# EAGLE board MainBoard (EAGLE 9.6.2)
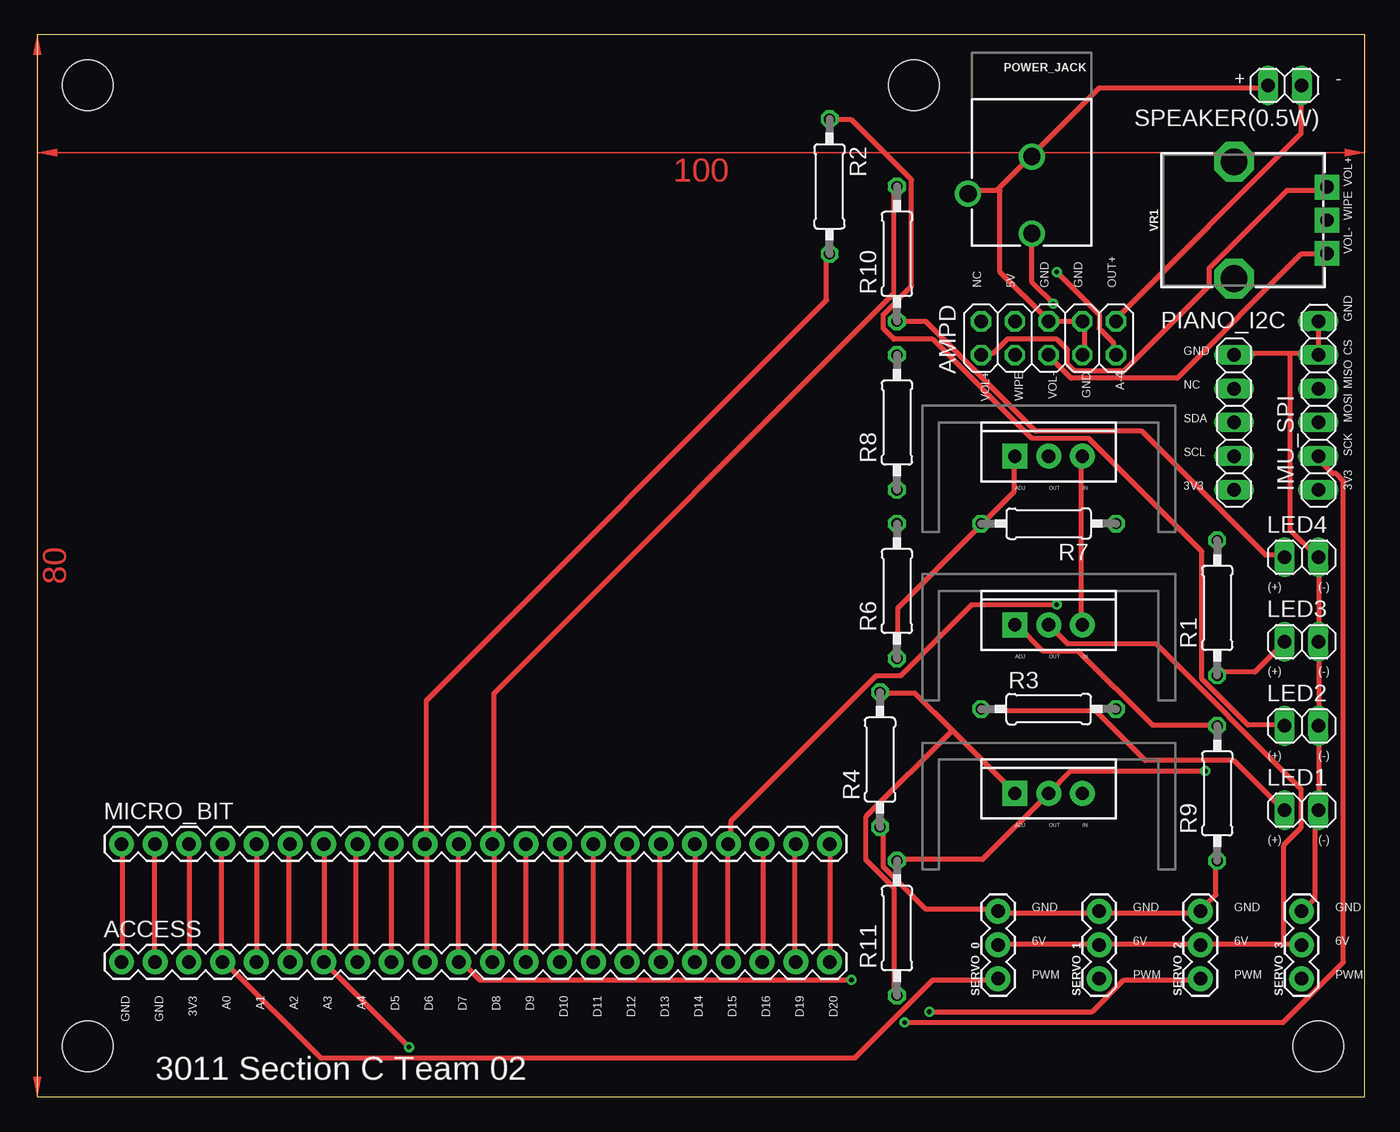
[diagram p0: board, top side]
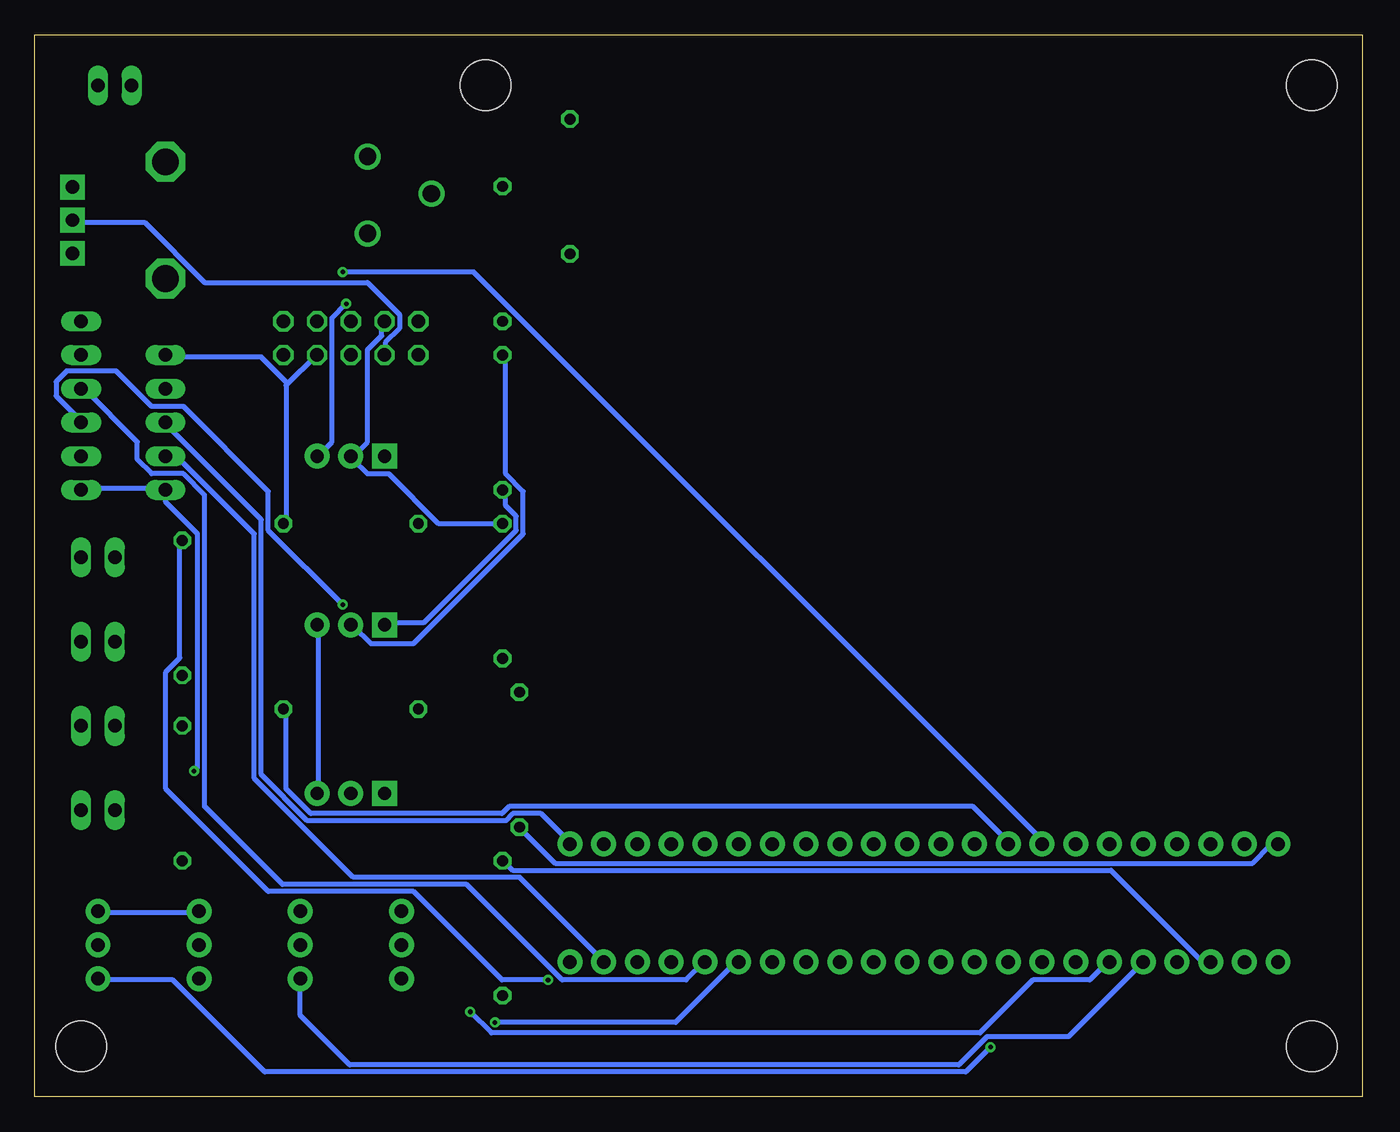
[diagram p1: board, bottom side, seen from below]

Size 100 x 80 mm. Coordinates in mm from the lower left corner, seen from the top.
Outline: 0,0 100,0 100,80 0,80 0,0
Copper layers (1*16): Top 0.035mm / dielectric 1.5mm / Bottom 0.035mm
Design rules "default *": minimum track width 15mil, minimum drill 0.35mm, track to track 6mil, track to pad 6mil, pad to pad 6mil, via to via 6mil, smd to smd 6mil, copper to edge 40mil, drill to drill 6mil, minimum pad ring 10mil, minimum via ring 8mil, stop-mask expansion 4mil, vias tented up to drill 0mil, thermal gap 10mil
Holes 3.81 mm at 3.81,3.81 96.52,3.81 3.81,76.2 66.04,76.2

## Footprints (pad centres in the part's own frame; a part is rotated, then mirrored left to right if it is on the bottom)
1X22 = drill 1.016 pad 1.88: 1 0,0; 2 2.54,0; 3 5.08,0; 4 7.62,0; 5 10.16,0; 6 12.7,0; 7 15.24,0; 8 17.78,0; 9 20.32,0; 10 22.86,0; 11 25.4,0; 12 27.94,0; 13 30.48,0; 14 33.02,0; 15 35.56,0; 16 38.1,0; 17 40.64,0; 18 43.18,0; 19 45.72,0; 20 48.26,0; 21 50.8,0; 22 53.34,0
2X05 = drill 1.016 octagon: 1 -5.08,-1.27; 2 -5.08,1.27; 3 -2.54,-1.27; 4 -2.54,1.27; 5 0,-1.27; 6 0,1.27; 7 2.54,-1.27; 8 2.54,1.27; 9 5.08,-1.27; 10 5.08,1.27
1X06 = drill 1.016 long: 1 -6.35,0; 2 -3.81,0; 3 -1.27,0; 4 1.27,0; 5 3.81,0; 6 6.35,0
1X02 = drill 1.016 long: 1 -1.27,0; 2 1.27,0
1X05 = drill 1.016 long: 1 -5.08,0; 2 -2.54,0; 3 0,0; 4 2.54,0; 5 5.08,0
POWER_JACK_PTH_BREAD = drill 1.3: GND 0,7.9; GNDBREAK 4.8,10.7; PWR 0,13.7
0207/10 = drill 0.813 octagon: 1 -5.08,0; 2 5.08,0
1X03 = drill 1.016 pad 1.88: 1 0,0; 2 2.54,0; 3 5.08,0
POT-PTH-ALPS = drill 1 pad 1.88 square: P$1 7,-2.5; P$2 7,0; P$3 7,2.5 | drill 2 octagon: P$4 0,-4.4; P$5 0,4.4
TO220-ADJ = drill 1 pad 1.88 square: ADJ -2.54,0 | drill 1 pad 1.88: IN 2.54,0; OUT 0,0

## Placement (x,y rotation side)
ACCESS  CONN_22_PTH  [1X22]  6.35,10.16 0 top
AMPD  [2X05]  76.2,57.15 180 top
IMU_SPI  [1X06]  96.52,52.07 90 top
LED1  [1X02]  95.25,21.59 0 top
LED2  [1X02]  95.25,27.94 0 top
LED3  [1X02]  95.25,34.29 0 top
LED4  [1X02]  95.25,40.64 0 top
MICRO_BIT  CONN_22_PTH  [1X22]  6.35,19.05 0 top
PIANO_I2C  [1X05]  90.17,50.8 90 top
POWER_JACK  POWER_JACKPTH_BREAD  [POWER_JACK_PTH_BREAD]  74.93,78.74 180 top
R1  750  [0207/10]  88.9,36.83 90 top
R2  750  [0207/10]  59.69,68.58 270 top
R3  750  [0207/10]  76.2,29.21 0 top
R4  1.8k  [0207/10]  63.5,25.4 90 top
R6  240  [0207/10]  64.77,38.1 90 top
R7  750  [0207/10]  76.2,43.18 180 top
R8  715  [0207/10]  64.77,50.8 90 top
R9  2.7k  [0207/10]  88.9,22.86 90 top
R10  750  [0207/10]  64.77,63.5 90 top
R11  470  [0207/10]  64.77,12.7 90 top
SERVO_0  SERVO  [1X03]  72.39,8.89 90 top
SERVO_1  SERVO  [1X03]  80.01,8.89 90 top
SERVO_2  SERVO  [1X03]  87.63,8.89 90 top
SERVO_3  SERVO  [1X03]  95.25,8.89 90 top
SPEAKER(0.5W)  [1X02]  93.98,76.2 180 top
VR1  10k  [POT-PTH-ALPS]  90.17,66.04 0 top
VREG1  V_REG_317SINK  [TO220-ADJ]  76.2,22.86 0 top
VREG2  V_REG_317SINK  [TO220-ADJ]  76.2,48.26 0 top
VREG3  V_REG_317SINK  [TO220-ADJ]  76.2,35.56 0 top

## Library data of the parts
ACCESS MICRO_BIT = SparkFun-Connectors; PROD_ID: CONN-13453
AMPD IMU_SPI LED1-LED4 PIANO_I2C SPEAKER(0.5W) = pinhead
POWER_JACK = SparkFun-Connectors; PROD_ID: COMP-13253
R1-R4 R6-R11 = rcl; SPICEPREFIX: R
SERVO_0 SERVO_1-SERVO_3 = SparkFun-Electromechanical
VR1 = SparkFun-Resistors; PROD_ID: RES-09177; SF_SKU: COM-09288
VREG1-VREG3 = SparkFun-IC-Power

## Nets
3V3: ACCESS.3 IMU_SPI.1 MICRO_BIT.3 PIANO_I2C.1 R11.2 VREG1.OUT
5V: AMPD.7 R6.2 VREG2.OUT
6V: R8.2 SERVO_0.2 SERVO_1.2 SERVO_2.2 SERVO_3.2 VREG3.OUT
A-0: ACCESS.4 MICRO_BIT.4 SERVO_0.1
A-1: ACCESS.5 MICRO_BIT.5 SERVO_1.1
A-2: ACCESS.6 MICRO_BIT.6 SERVO_2.1
A-3: ACCESS.7 MICRO_BIT.7 SERVO_3.1
A-4: ACCESS.8 AMPD.2 MICRO_BIT.8
D-5: ACCESS.9 MICRO_BIT.9 R3.2
D-6: ACCESS.10 MICRO_BIT.10 R2.2
D-7: ACCESS.11 MICRO_BIT.11 R1.2
D-8: ACCESS.12 MICRO_BIT.12 R10.2
D-9: ACCESS.13 MICRO_BIT.13
D-10: ACCESS.14 MICRO_BIT.14
D-11: ACCESS.15 MICRO_BIT.15
D-12: ACCESS.16 MICRO_BIT.16
D-13: ACCESS.17 IMU_SPI.2 MICRO_BIT.17
D-14: ACCESS.18 IMU_SPI.4 MICRO_BIT.18
D-15: ACCESS.19 IMU_SPI.3 MICRO_BIT.19
D-16: ACCESS.20 MICRO_BIT.20
D-19: ACCESS.21 MICRO_BIT.21 PIANO_I2C.2
D-20: ACCESS.22 MICRO_BIT.22 PIANO_I2C.3
GND1: ACCESS.1 AMPD.3 AMPD.4 AMPD.5 IMU_SPI.5 IMU_SPI.6 LED1.2 LED2.2 LED3.2 LED4.2 MICRO_BIT.1 PIANO_I2C.5 POWER_JACK.GND POWER_JACK.GNDBREAK R4.1 R7.1 R9.1 SERVO_0.3 SERVO_1.3 SERVO_2.3 SERVO_3.3 SPEAKER(0.5W).2
GND2: ACCESS.2 MICRO_BIT.2
MAIN6V: POWER_JACK.PWR VREG1.IN VREG2.IN VREG3.IN
N$1: LED1.1 R3.1
N$2: LED2.1 R2.1
N$3: LED3.1 R1.1
N$4: LED4.1 R10.1
N$6: R4.2 R11.1 VREG1.ADJ
N$8: R6.1 R7.2 VREG2.ADJ
N$10: R8.1 R9.2 VREG3.ADJ
OUT+: AMPD.1 SPEAKER(0.5W).1
VOL+: AMPD.10 VR1.P$3
VOL-: AMPD.6 VR1.P$1
WIPE: AMPD.8 VR1.P$2

## Tracks (layer width: path | path; a pad name or v marks a point on that pad's centre or on a via)
3V3  (via drill 0.35)
  Top 0.381: ACCESS.3 11.47,10.4 11.47,18.94 MICRO_BIT.3 | R11.2 64.81,17.87 71.21,17.87 VREG1.OUT 77.88,24.54 v88.01,24.54
  Bottom 0.381: IMU_SPI.1 96.28,45.87 90.41,45.87 PIANO_I2C.1 90.14,45.61 90.14,44.81 87.74,42.41 87.74,24.8 v88.01,24.54 | ACCESS.3 11.47,10.4 12.27,10.4 18.94,17.07 64.01,17.07 64.54,17.6 R11.2
5V
  Bottom 0.381: R6.2 64.81,43.2 69.61,43.2 73.34,46.94 74.94,46.94 76.01,48.01 VREG2.OUT 76.01,48.27 74.94,49.34 74.94,56.27 73.88,57.34 73.88,58.41 AMPD.7
6V
  Top 0.381: 80.01,11.47 72.54,11.47 SERVO_0.2 | 93.88,11.47 95.21,11.47 SERVO_3.2 | 93.88,11.47 87.74,11.47 SERVO_2.2 87.48,11.47 80.01,11.47 | 80.01,11.47 SERVO_1.2 | 93.88,11.47 93.88,18.94 95.21,20.27 95.21,23.2 84.28,34.14 77.61,34.14 76.28,35.47 VREG3.OUT
  Bottom 0.381: R8.2 64.54,55.74 64.54,46.94 63.21,45.61 63.21,42.41 71.48,34.14 74.68,34.14 76.01,35.47 VREG3.OUT
A-0
  Top 0.381: MICRO_BIT.4 13.87,18.94 13.87,10.4 ACCESS.4 14.13,10.13 21.34,2.93 61.61,2.93 67.47,8.8 72.28,8.8 SERVO_0.1
A-1
  Top 0.381: ACCESS.5 16.54,10.4 16.54,18.94 MICRO_BIT.5
  Bottom 0.381: SERVO_1.1 80.01,6.13 76.28,2.4 30.4,2.4 28.27,4.53 22.14,4.53 ACCESS.5
A-2  (via drill 0.35)
  Top 0.381: ACCESS.6 18.94,10.4 18.94,18.94 MICRO_BIT.6 | v67.21,6.4 79.48,6.4 81.88,8.8 87.48,8.8 SERVO_2.1
  Bottom 0.381: v67.21,6.4 65.61,4.8 28.8,4.8 24.8,8.8 20.54,8.8 19.2,10.13 ACCESS.6
A-3  (via drill 0.35)
  Top 0.381: MICRO_BIT.7 21.6,18.94 21.6,10.4 ACCESS.7 21.6,10.13 v28,3.73
  Bottom 0.381: v28,3.73 29.87,1.87 82.68,1.87 89.61,8.8 95.21,8.8 SERVO_3.1
A-4  (via drill 0.35)
  Top 0.381: v76.81,62.14 80.01,58.94 80.01,57.87 81.08,56.81 81.08,56.01 AMPD.2 | ACCESS.8 24,10.4 24,18.94 MICRO_BIT.8
  Bottom 0.381: v76.81,62.14 66.94,62.14 24,19.2 MICRO_BIT.8
D-5
  Top 0.381: MICRO_BIT.9 ACCESS.9
  Bottom 0.381: R3.2 81.08,29.07 81.08,23.2 79.21,21.34 64.81,21.34 64.28,21.87 29.34,21.87 26.67,19.2 MICRO_BIT.9
D-6
  Top 0.381: R2.2 59.47,63.48 59.47,60.01 29.34,29.87 29.34,19.2 MICRO_BIT.10 29.34,18.94 29.34,10.4 ACCESS.10
D-7  (via drill 0.35)
  Top 0.381: v61.34,8.8 33.34,8.8 32,10.13 ACCESS.11 31.74,10.4 31.74,18.94 MICRO_BIT.11
  Bottom 0.381: v61.34,8.8 64.81,8.8 71.48,15.47 82.41,15.47 90.14,23.2 90.14,32 89.08,33.07 89.08,41.87 R1.2
D-8
  Top 0.381: R10.2 64.54,68.54 64.54,60.54 34.4,30.4 34.4,19.2 MICRO_BIT.12 34.4,18.94 34.4,10.4 ACCESS.12
D-9
  Top 0.381: ACCESS.13 36.8,10.4 36.8,18.94 MICRO_BIT.13
D-10
  Top 0.381: ACCESS.14 39.47,10.4 39.47,18.94 MICRO_BIT.14
D-11
  Top 0.381: ACCESS.15 41.87,10.4 41.87,18.94 MICRO_BIT.15
D-12
  Top 0.381: ACCESS.16 44.54,10.4 44.54,18.94 MICRO_BIT.16
D-13  (via drill 0.35)
  Top 0.381: v65.34,5.6 93.88,5.6 98.41,10.13 98.41,46.41 97.88,46.94 97.61,46.94 96.55,48.01 IMU_SPI.2 | MICRO_BIT.17 46.94,18.94 46.94,10.4 ACCESS.17
  Bottom 0.381: v65.34,5.6 51.74,5.6 47.21,10.13 ACCESS.17
D-14
  Top 0.381: MICRO_BIT.18 49.61,18.94 49.61,10.4 ACCESS.18
  Bottom 0.381: IMU_SPI.4 96.28,53.34 92.28,49.34 92.28,48.01 91.21,46.94 88.81,46.94 87.21,45.34 87.21,21.87 81.34,16 67.47,16 60.27,8.8 50.94,8.8 49.61,10.13 ACCESS.18
D-15  (via drill 0.35)
  Top 0.381: v76.81,37.07 70.41,37.07 65.08,31.74 63.21,31.74 52.27,20.8 52.27,19.2 MICRO_BIT.19 52.01,18.94 52.01,10.4 ACCESS.19
  Bottom 0.381: v76.81,37.07 82.41,42.67 82.41,45.61 88.81,52.01 91.21,52.01 93.88,54.67 97.61,54.67 98.41,53.87 98.41,52.81 96.55,50.94 IMU_SPI.3
D-16
  Top 0.381: ACCESS.20 54.67,10.4 54.67,18.94 MICRO_BIT.20
D-19
  Top 0.381: MICRO_BIT.21 57.07,18.94 57.07,10.4 ACCESS.21
  Bottom 0.381: PIANO_I2C.2 90.14,48.01 89.08,48.01 83.48,42.41 83.48,24 76.01,16.54 63.48,16.54 57.34,10.4 ACCESS.21
D-20
  Top 0.381: ACCESS.22 59.74,10.4 59.74,18.94 MICRO_BIT.22
  Bottom 0.381: PIANO_I2C.3 90.14,50.67 82.94,43.47 82.94,24.27 79.48,20.8 64.54,20.8 64.01,21.34 61.87,21.34 59.74,19.2 MICRO_BIT.22
GND1
  Top 0.381: SPEAKER(0.5W).2 92.55,76.01 80.01,76.01 74.94,70.94 POWER_JACK.GND 74.68,70.67 72.41,68.41 | 72.41,68.41 72.28,68.28 70.14,68.28 POWER_JACK.GNDBREAK | 94.41,56.01 96.28,56.01 IMU_SPI.5 96.55,56.01 96.55,58.41 IMU_SPI.6 | 94.41,56.01 90.41,56.01 PIANO_I2C.5 | AMPD.4 78.94,56.01 78.94,58.41 AMPD.3 78.68,58.41 76.28,58.41 AMPD.5 76.01,58.67 72.54,62.14 72.54,68.28 72.41,68.41 | R9.1 88.81,17.6 88.81,15.2 87.74,14.13 SERVO_2.3 87.48,13.87 80.01,13.87 | ACCESS.1 6.4,10.4 6.4,18.94 MICRO_BIT.1 | R4.1 63.74,20.27 63.74,17.34 66.94,14.13 72.28,14.13 SERVO_0.3 72.54,13.87 80.01,13.87 | 80.01,13.87 SERVO_1.3 | SERVO_3.3 95.48,14.13 96.28,14.94 96.28,21.34 LED1.2 96.55,21.6 96.55,27.74 LED2.2 96.55,28 96.55,34.14 LED3.2 96.55,34.4 96.55,40.54 LED4.2 96.28,40.8 94.41,42.67 94.41,56.01
  Bottom 0.381: 80.94,53.74 78.94,55.74 AMPD.4 | 80.94,53.74 81.08,53.61 81.08,43.2 R7.1 | 80.94,53.74 82.94,55.74 90.14,55.74 PIANO_I2C.5 | SERVO_3.3 95.21,13.87 87.74,13.87 SERVO_2.3 | MICRO_BIT.1 6.4,18.94 6.93,18.94 8.27,17.6 60.81,17.6 63.48,20.27 R4.1
GND2
  Top 0.381: ACCESS.2 8.8,10.4 8.8,18.94 MICRO_BIT.2
MAIN6V  (via drill 0.35)
  Top 0.381: VREG2.IN 78.68,48.01 78.68,35.74 VREG3.IN | v76.54,59.74 74.94,61.34 74.94,64.81 POWER_JACK.PWR
  Bottom 0.381: VREG1.IN 78.68,22.94 78.68,35.47 VREG3.IN | v76.54,59.74 77.61,58.67 77.61,49.34 78.68,48.27 VREG2.IN
N$1
  Top 0.381: R3.1 71.21,29.07 79.74,29.07 83.48,25.34 90.14,25.34 93.88,21.6 LED1.1
N$2
  Top 0.381: R2.1 59.74,73.61 61.34,73.61 65.88,69.08 65.88,61.07 63.74,58.94 63.74,57.87 64.54,57.07 67.47,57.07 74.94,49.61 79.21,49.61 87.74,41.07 87.74,31.47 91.21,28 93.88,28 LED2.1
N$3
  Top 0.381: R1.1 89.08,32 91.75,32 93.88,34.14 LED3.1
N$4
  Top 0.381: R10.1 64.81,58.41 66.94,58.41 75.21,50.14 83.21,50.14 92.55,40.8 93.88,40.8 LED4.1
N$6
  Top 0.381: 68.94,27.6 73.61,22.94 VREG1.ADJ | 68.94,27.6 66.14,30.4 63.74,30.4 R4.2 | 68.94,27.6 62.41,21.07 62.41,17.87 64.54,15.73 64.54,7.73 R11.1
N$8
  Top 0.381: R6.1 64.81,33.07 64.81,36.8 70.94,42.94 R7.2 71.21,43.2 73.61,45.61 73.61,48.01 VREG2.ADJ
N$10
  Top 0.381: R9.2 88.81,28 84.01,28 78.41,33.6 75.74,33.6 73.88,35.47 VREG3.ADJ
  Bottom 0.381: R8.1 64.54,45.61 64.54,44.54 63.74,43.74 63.74,42.67 70.67,35.74 73.61,35.74 VREG3.ADJ
OUT+
  Top 0.381: AMPD.1 81.34,58.67 95.21,72.54 95.21,76.01 SPEAKER(0.5W).1
VOL+
  Top 0.381: AMPD.10 71.21,56.01 72.01,56.01 73.08,57.07 76.81,57.07 77.61,56.27 77.61,55.21 78.14,54.67 81.88,54.67 88.28,61.07 88.28,62.41 94.14,68.28 97.08,68.28 VR1.P$3
VOL-
  Top 0.381: AMPD.6 76.28,55.74 77.88,54.14 85.88,54.14 95.21,63.48 97.08,63.48 VR1.P$1
WIPE
  Bottom 0.381: AMPD.8 73.61,56.01 73.61,56.81 72.54,57.87 72.54,58.94 74.94,61.34 87.21,61.34 91.75,65.88 97.08,65.88 VR1.P$2
(copper drawn outside any net)
  shapes: Top area x2

## Text on the board
tPlace: + | - | VOL+ | WIPE | VOL- | NC | 5V | GND | GND | OUT+ | GND | GND | CS | VOL+ | WIPE | VOL- | GND | A-4 | NC | MISO | SDA | MOSI | SCL | SCK | ADJ | OUT | IN | 3V3 | 3V3 | (+) | (-) | ADJ | OUT | IN | (+) | (-) | (+) | (-) | ADJ | OUT | IN | (+) | (-) | GND | GND | GND | GND | 6V | 6V | 6V | 6V | PWM | PWM | PWM | PWM | GND | GND | 3V3 | A0 | A1 | A2 | A3 | A4 | D5 | D6 | D7 | D8 | D9 | D10 | D11 | D12 | D13 | D14 | D15 | D16 | D19 | D20 | 3011 Section C Team 02